# EAGLE board DIYTIL311_v1.0 (EAGLE 9.4.2)
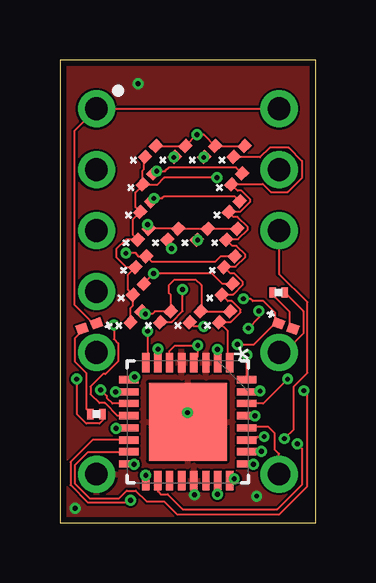
[diagram p0: board, top side]
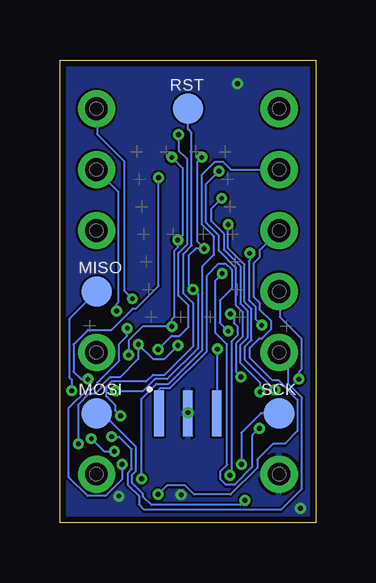
[diagram p1: board, bottom side, seen from below]

Size 10.67 x 19.31 mm. Coordinates in mm from the lower left corner, seen from the top.
Outline: 0,0 10.67,0 10.67,19.31 0,19.31 0,0
Copper layers (1*16): Top 0.035mm / dielectric 1.5mm / Bottom 0.035mm
Design rules "JLCPCB": minimum track width 3.5mil, minimum drill 0.2mm, track to track 3.5mil, track to pad 3.5mil, pad to pad 3.5mil, via to via 5mil, smd to smd 0mil, copper to edge 10mil, drill to drill 6mil, minimum pad ring 3mil, minimum via ring 5mil, stop-mask expansion 4mil, vias tented up to drill 0mil, thermal gap 5mil
Net classes: 0 default: width 0.089 mm, clearance 0.089 mm; 1 ground: width 0.089 mm

## Footprints (pad centres in the part's own frame; a part is rotated, then mirrored left to right if it is on the bottom)
LEDC0603X33 = smd 0.455 x 0.397: 1 -0.321,0; 2 0.321,0
B1,27 = smd 1.27 x 1.27: TP 0,0
R0201 = smd 0.28 x 0.43: 1 -0.255,0; 2 0.255,0
QFN50P500X500X100-33N = smd 0.813 x 0.305: 1 -2.464,1.753; 2 -2.464,1.245; 3 -2.464,0.762; 4 -2.464,0.254; 5 -2.464,-0.254; 6 -2.464,-0.762; 7 -2.464,-1.245; 8 -2.464,-1.753; 17 2.464,-1.753; 18 2.464,-1.245; 19 2.464,-0.762; 20 2.464,-0.254; 21 2.464,0.254; 22 2.464,0.762; 23 2.464,1.245; 24 2.464,1.753 | smd 0.305 x 0.813: 9 -1.753,-2.464; 10 -1.245,-2.464; 11 -0.762,-2.464; 12 -0.254,-2.464; 13 0.254,-2.464; 14 0.762,-2.464; 15 1.245,-2.464; 16 1.753,-2.464; 25 1.753,2.464; 26 1.245,2.464; 27 0.762,2.464; 28 0.254,2.464; 29 -0.254,2.464; 30 -0.762,2.464; 31 -1.245,2.464; 32 -1.753,2.464 | smd 3.251 x 3.251: 33 0,0
MFF = smd 0.4 x 1.9: P$1 -1.2,0; P$2 0,0; P$3 1.2,0
TIL311DIP_FOOTPRINT = drill 0.95 pad 1.55: 1 -3.81,7.62; 2 -3.81,5.08; 3 -3.81,2.54; 4 -3.81,0; 5 -3.81,-2.54; 7 -3.81,-7.62; 8 3.81,-7.62; 10 3.81,-2.54; 12 3.81,2.54; 13 3.81,5.08; 14 3.81,7.62

## Placement (x,y rotation side)
L1  0201.LED0201  [LEDC0603X33]  3.78,15.49 45 top
L2  0201.LED0201  [LEDC0603X33]  5.01,15.49 45 top
L3  0201.LED0201  [LEDC0603X33]  6.24,15.49 45 top
L4  0201.LED0201  [LEDC0603X33]  7.47,15.49 45 top
L5  0201.LED0201  [LEDC0603X33]  7.37,14.35 45 top
L6  0201.LED0201  [LEDC0603X33]  7.27,13.2 45 top
L7  0201.LED0201  [LEDC0603X33]  7.17,12.04 45 top
L8  0201.LED0201  [LEDC0603X33]  7.07,10.9 45 top
L9  0201.LED0201  [LEDC0603X33]  6.97,9.74 45 top
L10  0201.LED0201  [LEDC0603X33]  6.87,8.6 45 top
L11  0201.LED0201  [LEDC0603X33]  5.64,8.6 45 top
L12  0201.LED0201  [LEDC0603X33]  4.41,8.6 45 top
L13  0201.LED0201  [LEDC0603X33]  3.17,8.6 45 top
L14  0201.LED0201  [LEDC0603X33]  3.28,9.74 45 top
L15  0201.LED0201  [LEDC0603X33]  3.38,10.9 45 top
L16  0201.LED0201  [LEDC0603X33]  3.48,12.04 45 top
L17  0201.LED0201  [LEDC0603X33]  3.58,13.2 45 top
L18  0201.LED0201  [LEDC0603X33]  3.68,14.35 45 top
L19  0201.LED0201  [LEDC0603X33]  4.71,12.04 45 top
L20  0201.LED0201  [LEDC0603X33]  5.94,12.04 45 top
MISO  TPB1,27  [B1,27]  9.14,9.65 0 bottom
MOSI  TPB1,27  [B1,27]  9.14,4.57 0 bottom
R1  330  [R0201]  9.12,9.61 180 top
R2  330  [R0201]  1.52,4.54 180 top
RST  TPB1,27  [B1,27]  5.33,17.27 0 bottom
SCK  TPB1,27  [B1,27]  1.52,4.57 0 bottom
U1  ATMEGA328P-MU  [QFN50P500X500X100-33N]  5.33,4.22 270 top
U$21  0201.LED0201  [LEDC0603X33]  1.23,8.21 200 top
U$22  0201.LED0201  [LEDC0603X33]  9.43,8.21 340 top
U$23  CSTNE16M0V53Z000R0  [MFF]  5.33,4.57 0 bottom
U$24  TIL311DIP  [TIL311DIP_FOOTPRINT]  5.33,9.65 0 top

## Library data of the parts
L1-L20 U$21-U$24 = FUCK,_no_one_makes_is_so_I_might_as_well...
MISO MOSI RST SCK = testpad
R1 R2 = rcl; SPICEPREFIX: R
U1 = Atmel_By_element14_Batch_1-00; MPN: ATMEGA328P-MU; OC_FARNELL: 1748522; OC_NEWARK: 26R2526; PACKAGE: QFN-32; SUPPLIER: Atmel

## Nets
BLNK: U1.28 U$24.8
DI-A: U1.23 U$24.3
DI-B: U1.24 U$24.2
DI-C: U1.25 U$24.13
DI-D: U1.26 U$24.12
GND [ground]: U1.3 U1.5 U1.21 U1.33 U$23.P$2 U$24.7
HOLD: U1.27 U$24.5
LDP: R2.1 U$24.4
N$1: R1.2 U$22.2
N$2: R2.2 U$21.2
N$3: L4.1 L5.1 L6.1 L7.1 L8.1 L9.1 L10.1 U1.1
N$4: L1.1 L13.1 L14.1 L15.1 L16.1 L17.1 L18.1 U1.30
N$5: L2.1 L12.1 L19.1 U1.31
N$6: L3.1 L11.1 L20.1 U1.32
N$7: L1.2 L2.2 L3.2 L4.2 U1.2
N$8: L5.2 L18.2 U1.9
N$9: L6.2 L17.2 U1.10
N$10: L7.2 L16.2 L19.2 L20.2 U1.11
N$11: L8.2 L15.2 U1.12
N$12: SCK.TP U1.16
N$13: MISO.TP U1.15
N$14: MOSI.TP U1.14
N$15: RST.TP U1.29
N$16: L9.2 L14.2 U1.13
N$17: L10.2 L11.2 L12.2 L13.2 U1.17
N$18: U1.7 U$23.P$3
N$19: U1.8 U$23.P$1
RDP: R1.1 U$24.10
VCC: U1.4 U1.6 U1.18 U$21.1 U$22.1 U$24.1 U$24.14

## Tracks (layer width: path | path; a pad name or v marks a point on that pad's centre or on a via)
BLNK
  Top 0.089: U$24.8 9.14,2.88 8.95,3.08 8.95,3.75 8.7,4 8,4 U1.28
DI-A  (via drill 0.2)
  Top 0.089: U1.23 v6.58,1.2 v6.57,1.19
  Bottom 0.089: U$24.3 2.33,11.39 2.33,11.09 2.58,10.83 2.58,9.43 2.32,9.16 2.32,8.88 1.85,8.41 1.85,8.09 2.23,7.7 2.35,7.7 2.75,7.31 2.75,6.88 1.81,5.95 1.53,5.95 1.3,5.71 1.3,5.69 0.76,5.14 0.76,3.83 1.28,3.3 1.78,3.3 2.43,2.65 2.43,2.3 3.54,1.19 5.07,1.19 5.45,1.57 6.19,1.57 v6.57,1.19
DI-B  (via drill 0.2)
  Top 0.089: U1.24 7.19,1.76 v7.27,1.84
  Bottom 0.089: v7.27,1.84 7.27,5.17 6.64,5.8 6.14,5.8 4.72,7.23 4.72,9.57 4.72,10.71 4.24,11.2 4.24,11.94 4.75,12.45 4.75,14.52 4.21,15.07 3.88,15.07 3.54,14.73 U$24.2
DI-C  (via drill 0.2)
  Top 0.089: U1.25 8.05,2.47 v8.07,2.45 | v8.3,8.84 8.3,8.56 v7.86,8.12
  Bottom 0.089: v8.07,2.45 8.07,1.83 8.77,1.13 9.52,1.13 10.3,1.91 10.3,4.8 9.52,5.58 9.32,5.58 9.1,5.8 9.1,5.86 8.2,6.77 8.2,7.47 7.86,7.8 v7.86,8.12 | v8.3,8.84 8.3,9.14 8.24,9.2 8.24,13.83 U$24.13
DI-D  (via drill 0.2)
  Top 0.089: U1.26 v8.4,2.99 | U$24.12 9.14,10.39 10.33,9.21 10.33,6.26 9.75,5.69 9.75,5.08 9.75,3.91 v9.36,3.52
  Bottom 0.089: v9.36,3.52 8.83,2.99 v8.4,2.99
GND  (via drill 0.2)
  other vias: 5.32,4.6 3.26,18.32 0.64,0.61 8.21,1.12 5.61,1.17
  pour Top: 0,0 10.67,0 10.67,19.31 0,19.31
  pour Bottom: 0,0 10.67,0 10.67,19.31 0,19.31
HOLD  (via drill 0.2)
  Top 0.089: U1.27 8.12,3.46 8.26,3.6 v8.52,3.6
  Bottom 0.089: v8.52,3.6 8.2,3.6 7.67,3.08 7.67,2.25 7.85,2.08 7.85,1.6 7.38,1.13 7.38,0.78 7.15,0.55 1.45,0.55 0.57,1.43 0.57,5.24 1.14,5.81 1.14,6.7 1.56,7.12 U$24.5
LDP  (via drill 0.2)
  Top 0.089: v0.7,6 0.7,4.55 1.1,4.15 1.65,4.15 1.77,4.28 R2.1
  Bottom 0.089: v0.7,6 0.7,6.3 0.6,6.4 0.6,7.7 1.5,8.6 1.5,9.5 U$24.4
N$1
  Top 0.089: R1.2 8.87,9.52 9.59,8.8 9.59,8.24 U$22.2
N$2
  Top 0.089: R2.2 1.26,4.59 1.1,4.76 1.1,6.26 0.62,6.74 0.62,7.7 0.92,8.01 U$21.2
N$3
  Top 0.089: U1.1 7,6.75 7,8 6.64,8.36 L10.1 6.66,8.39 7.13,8.39 7.53,8.79 7.53,8.9 7.17,9.26 7.01,9.26 L9.1 6.76,9.54 7.23,9.54 7.63,9.94 7.63,10.05 7.28,10.41 7.11,10.41 L8.1 6.86,10.69 7.33,10.69 7.73,11.09 7.73,11.2 7.37,11.56 7.21,11.56 L7.1 6.97,11.84 7.43,11.84 7.83,12.24 7.83,12.35 7.41,12.77 7.25,12.77 L6.1 7.52,12.97 7.93,13.39 7.93,13.5 7.58,13.86 7.41,13.86 L5.1 7.17,14.14 8.46,14.14 8.8,13.8 9.51,13.8 10.1,14.39 10.1,15.1 9.55,15.65 8.75,15.65 8.35,15.25 7.25,15.25 L4.1
N$4  (via drill 0.2)
  Top 0.089: L1.1 3.5,15.25 3.5,14.75 3.45,14.7 3.45,14.25 3.5,14.25 L18.1 3.47,14.1 | v6.55,14.4 4.35,14.4 4.05,14.1 3.47,14.1 | U1.30 8.48,4.98 v9.5,6 | L13.1 2.95,8.97 3.05,9.07 L14.1 2.85,9.72 2.85,10.37 L15.1 3.13,10.65 2.79,10.65 2.35,11.09 2.35,11.41 2.75,11.82 L16.1 | L16.1 | 3.47,14.1 3.15,13.78 3.15,13.17 L17.1 3.05,12.67 3.05,12.02 L16.1
  Bottom 0.089: v9.5,6 9.79,6 10.1,6.31 10.1,7.45 9.5,8.05 8.52,8.05 7.62,8.95 7.49,8.95 6.55,9.89 v6.55,14.4
N$5  (via drill 0.2)
  Top 0.089: v8.35,5.5 8,5.5 U1.31 | L2.1 4.77,15.25 v4.75,15.25 | L19.1 4.65,11.65 v4.65,11.45 | L12.1 4.2,8.39 4.67,8.39 5.12,8.84 v5.12,9.74
  Bottom 0.089: v4.75,15.25 4.95,15.05 4.95,11.75 v4.65,11.45 5,11.45 5.3,11.15 5.3,9.92 v5.12,9.74 4.92,9.54 4.92,7.28 6.2,6 6.7,6 7.21,5.5 v8.35,5.5
N$6  (via drill 0.2)
  Top 0.089: v7.8,7 U1.32 | v5.75,11.8 5.73,11.8 L20.1 | L3.1 v6,15.25 | v6,8.2 5.58,8.2 L11.1
  Bottom 0.089: v6,15.25 5.55,14.8 5.55,12 v5.75,11.8 5.75,11.5 5.9,11.35 5.9,8.6 6,8.5 v6,8.2 7.21,8.2 7.8,7.61 v7.8,7
N$7  (via drill 0.2)
  Top 0.089: L4.2 L3.2 6,16.19 v5.72,16.19 5.71,16.19 L2.2 L1.2 | v6.57,7.24 v6.58,7.23 U1.2
  Bottom 0.089: v5.72,16.19 5.72,15.53 5.35,15.16 5.35,11.63 5.72,11.26 5.72,9.49 5.3,9.06 5.3,8.19 5.68,7.8 6.01,7.8 v6.57,7.24
N$8  (via drill 0.2)
  Top 0.089: v3.12,6.09 3,5.97 U1.9 | L18.2 4,14.67 v4.04,14.67 4.39,14.67 4.54,14.82 7.35,14.82 L5.2
  Bottom 0.089: v3.12,6.09 3.32,6.29 3.32,7.49 3.03,7.78 3.03,8.78 3.32,9.07 3.32,10.64 4.04,11.35 4.04,11.99 4.57,12.52 4.57,14.14 v4.04,14.67
N$9  (via drill 0.2)
  Top 0.089: U1.10 v2.32,5.47 | L17.2 v3.92,13.54 4.27,13.54 4.35,13.62 7.3,13.62 L6.2
  Bottom 0.089: v2.32,5.47 2.32,5.86 3.14,6.68 3.14,7.42 2.85,7.71 2.85,8.85 3.15,9.15 3.15,10.71 3.83,11.39 3.83,12.06 4.35,12.59 4.35,13.11 v3.92,13.54
N$10  (via drill 0.2)
  Top 0.089: L16.2 3.65,12.33 v3.65,12.45 3.83,12.27 L19.2 L20.2 L7.2 | v1.7,5.55 1.95,5.3 1.95,5.23 2.2,4.98 U1.11
  Bottom 0.089: v1.7,5.55 2.95,6.8 2.95,7.36 2.67,7.63 2.67,8.93 2.97,9.22 2.97,10.79 3.65,11.47 v3.65,12.45
N$11  (via drill 0.2)
  Top 0.089: L8.2 6.7,11.12 6.48,10.9 3.83,10.9 L15.2 3.27,11.12 3.17,11.25 v2.75,11.25 | U1.12 2.4,4.48 1.88,5 1.65,5 1.28,5.37 1.28,5.69 1.79,6.21 1.9,6.21 2.43,6.74 2.43,7.49 2.25,7.67 v2.25,8.25
  Bottom 0.089: v2.25,8.25 2.5,8.5 2.5,9 2.79,9.29 2.79,10.91 2.75,10.95 v2.75,11.25
N$12  (via drill 0.2)
  Top 0.152: U1.16 3.08,2.47 v3.1,2.45
  Bottom 0.089: SCK.TP 2.29,4.57 3.1,3.76 v3.1,2.45
N$13  (via drill 0.2)
  Top 0.089: U1.15 2.84,2.94 1.15,2.94 0.62,2.41 0.62,1.66 1.25,1.03 2.46,1.03 2.79,1.35 3.17,1.35 3.62,0.9 4.35,0.9 4.88,0.36 9.16,0.36 10.32,1.52 10.32,5.38 v10.18,5.52
  Bottom 0.089: v10.18,5.52 10.18,5.97 10.28,6.07 10.28,8.52 MISO.TP
N$14  (via drill 0.2)
  Top 0.089: v2.95,0.95 2.85,0.85 1.17,0.85 0.44,1.58 0.44,2.54 1.36,3.46 U1.14
  Bottom 0.089: v2.95,0.95 3.15,0.75 6.85,0.75 7.2,1.1 7.2,1.21 7.67,1.68 7.67,2 7.49,2.18 7.49,3.18 8.88,4.57 MOSI.TP
N$15  (via drill 0.2)
  Top 0.089: U1.29 v8.13,4.48 v8.14,4.47
  Bottom 0.089: v8.14,4.47 8.37,4.7 8.37,4.92 8.75,5.29 8.75,5.67 8.52,5.9 7.08,5.9 6.79,6.18 6.3,6.18 5.1,7.39 5.1,9.16 5.52,9.57 5.52,11.22 5.17,11.56 5.17,16.26 5.33,16.42 RST.TP
N$16  (via drill 0.2)
  Top 0.089: L14.2 3.5,10 v3.9,10.4 6.35,10.4 6.78,9.97 L9.2 | U1.13 2.85,3.95 v2.35,3.95
  Bottom 0.089: v3.9,10.4 4.2,10.1 4.2,7.95 3.7,7.45 3.7,2.43 3.98,2.15 3.98,1.82 3.75,1.59 3.4,1.59 2.65,2.33 2.65,3.65 v2.35,3.95
N$17  (via drill 0.2)
  Top 0.089: U1.17 v3.58,1.99 | L10.2 L11.2 5.9,8.85 5.9,9.92 5.67,10.15 4.79,10.15 4.55,9.91 4.55,9.59 4.63,9.5 L12.2 3.96,8.82 3.86,8.72 v3.56,8.72 3.46,8.82 L13.2
  Bottom 0.089: v3.58,1.99 3.52,2.05 3.52,7.56 3.25,7.83 3.25,8.16 3.42,8.33 3.42,8.58 v3.56,8.72
N$18  (via drill 0.2)
  Top 0.089: v4.1,7.25 U1.7
  Bottom 0.089: v4.1,7.25 4.1,4.62 U$23.P$3
N$19  (via drill 0.2)
  Top 0.089: v3.65,8 3.65,6.75 U1.8
  Bottom 0.089: v3.65,8 4,8.34 4,9.29 3.5,9.79 3.5,10.56 3.75,10.82 4.04,10.82 4.54,10.32 4.54,7.15 6.07,5.63 6.47,5.63 6.53,5.57 U$23.P$1
RDP
  Top 0.089: U$24.10 9.37,7.12 10.15,7.9 10.15,8.84 R1.1
VCC  (via drill 0.2)
  Top 0.089: v7.4,7.45 8.1,7.45 8.87,8.22 9.12,8.22 U$22.1 8.97,8.47 8.97,8.78 8.5,9.25 8.05,9.25 7.95,9.35 v7.65,9.35 | U1.18 4.09,1.31 4.2,1.2 4.5,1.2 5.12,0.57 9.07,0.57 10.1,1.6 10.1,3.1 v9.9,3.3 | U$21.1 1.38,8.32 0.62,9.08 0.62,16.37 U$24.1 U$24.14 | U1.6 4.57,7.17 4.8,7.4 v5.75,7.4 5.75,6.95 5.59,6.79 U1.4
  Bottom 0.089: v7.65,9.35 8,9.7 8,15.1 9.12,16.23 9.12,17.25 U$24.14 | v9.9,3.3 9.92,3.32 9.92,4.93 9.45,5.4 9.19,5.4 8.93,5.66 8.93,5.74 8.59,6.08 8.16,6.08 7.4,6.83 v7.4,7.45 6.79,6.84 6.31,6.84 v5.75,7.4